# Altium PCB JohnPCB2.PcbDoc
Units mm, origin at the board's own origin, x right, y up, seen from the top; angles counter-clockwise.
Board outline 60 x 75 mm, 2 copper layers (Top Layer, Bottom Layer); 72 components, 52 nets, 225 pads, 24 vias.
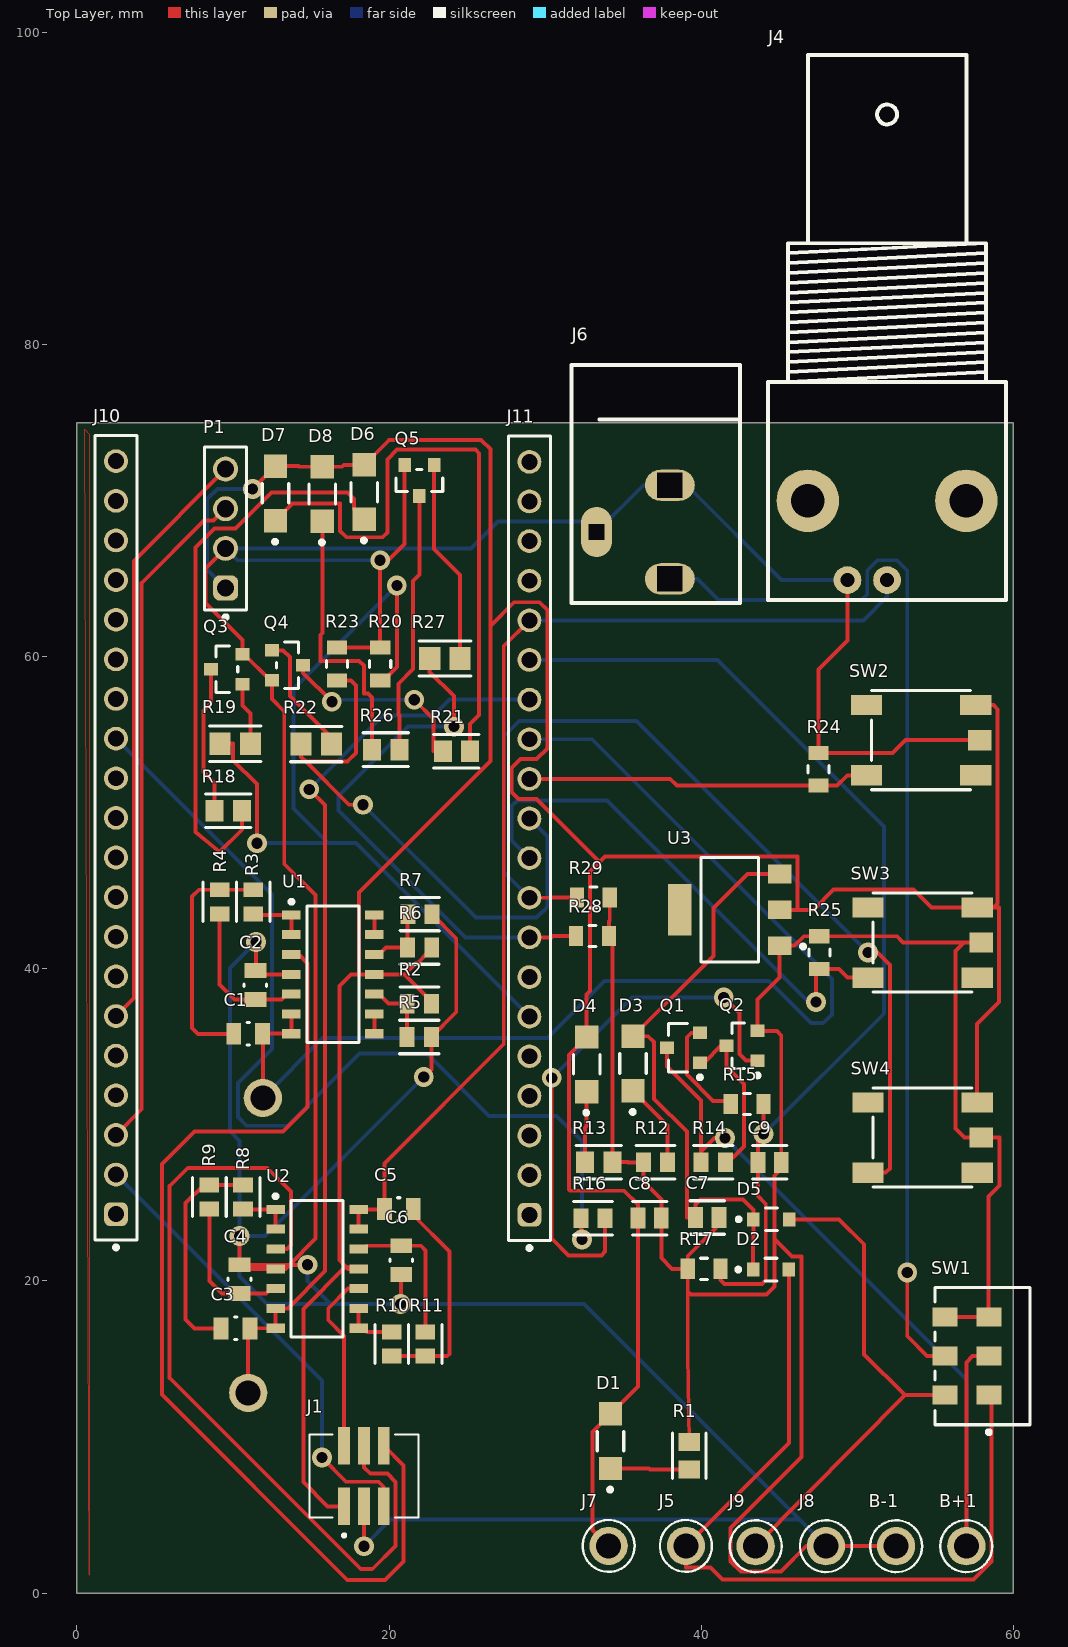
[diagram p0: Top Layer view]
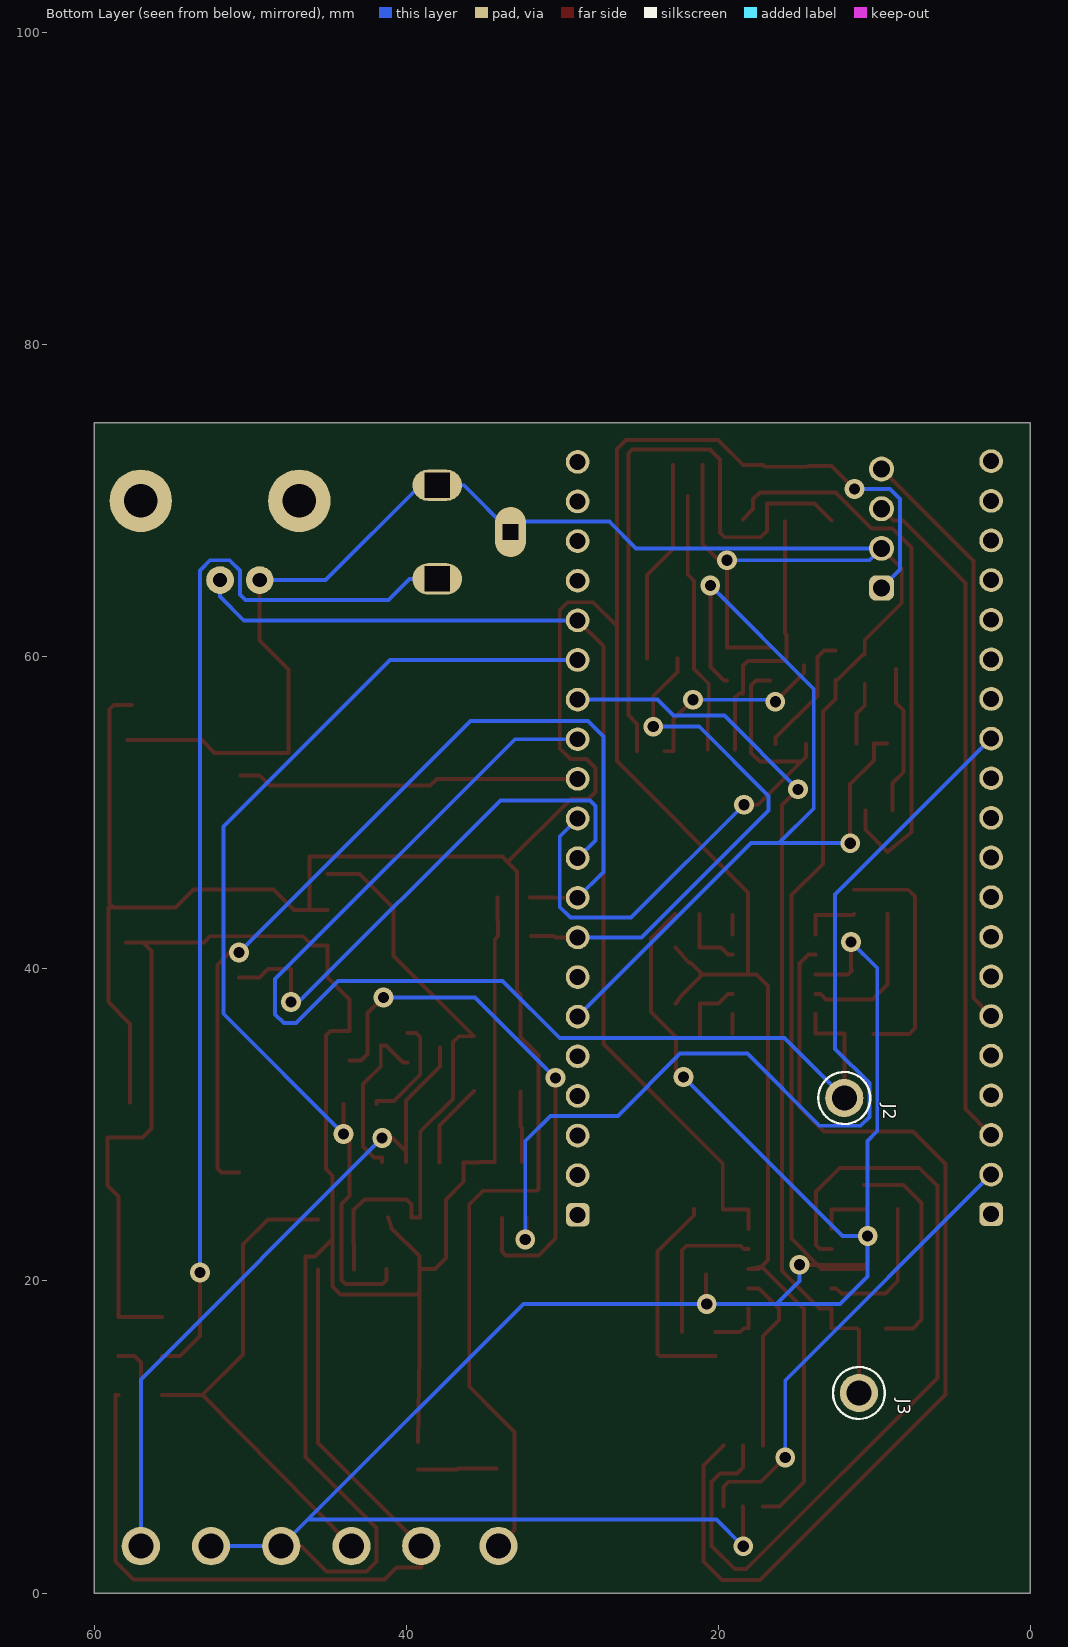
[diagram p1: Bottom Layer view, seen from below]
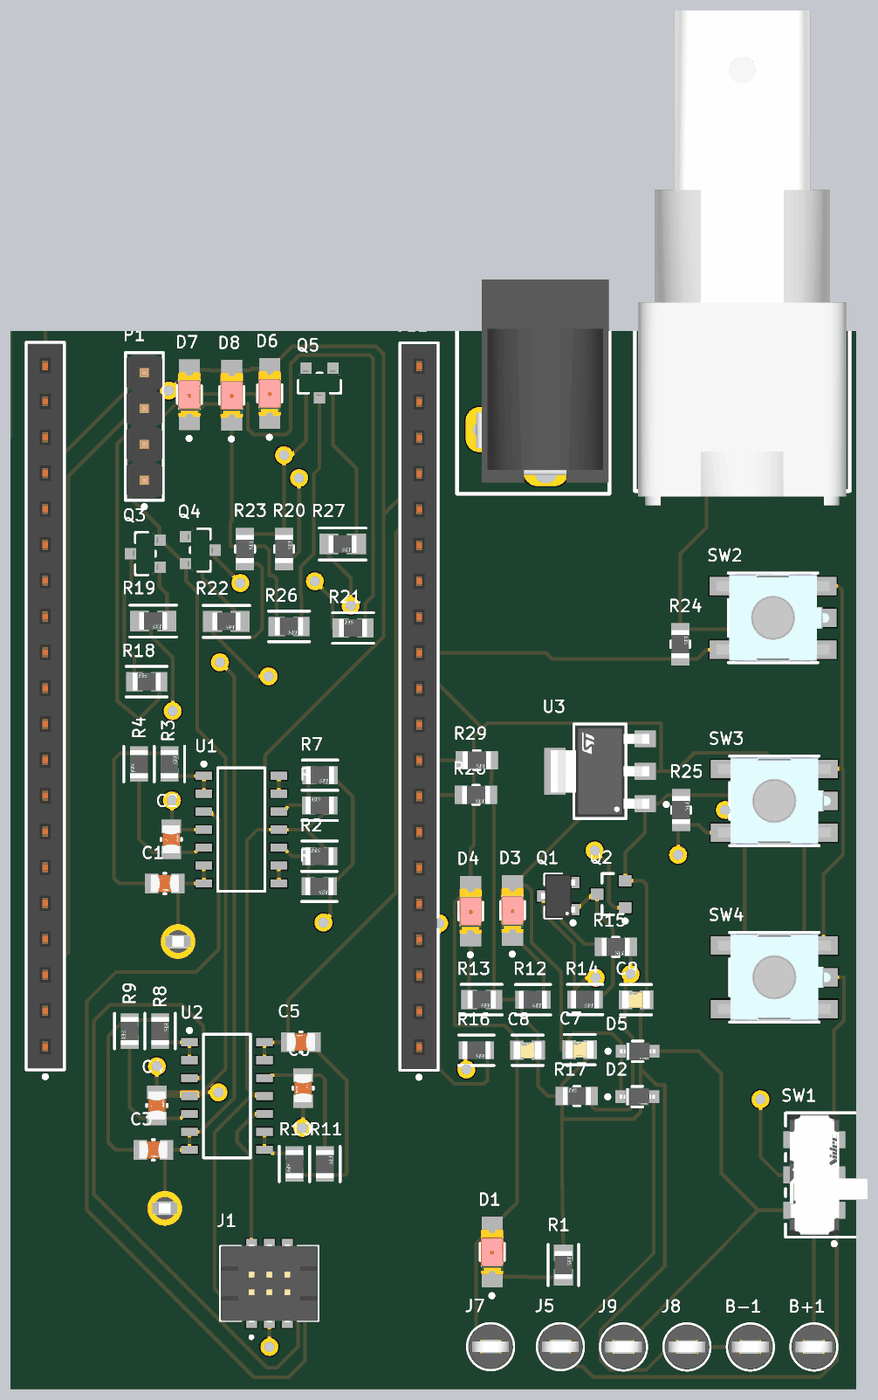
[diagram p2: 3D render of the assembled board from above, using the file's embedded part models]

## Layer stack, top to bottom
Top Solder: solder mask 0.0102, Solder Resist, Dk 3.5
Top Layer: signal copper 0.0356
Dielectric 1: dielectric 0.32, FR-4, Dk 4.8
Bottom Layer: signal copper 0.0356
Bottom Solder: solder mask 0.0102, Solder Resist, Dk 3.5

## Board outline
0,0 60,0 60,75 0,75

## Design rules (kind name [scope] priority, off if disabled: settings)
Clearance [All] p1: gap=0.254 ignorepadtopadclearanceinfootprint=FALSE
PolygonConnect [All] p1: connectstyle=Relief reliefconductorwidth=0.254 reliefentries=4 polygonreliefangle="90 Angle" airgapwidth=0.254
RoutingVias [All] p1: holewidth=0.711 width=1.27 viastyle="Through Hole" minholewidth=0.711 minwidth=1.27 maxholewidth=0.711 maxwidth=1.27
SolderMaskExpansion [All] p1: expansion=0.102 istentingtop=FALSE
SupplyNets "Schematic Supply Nets_1" [InNet('+3V3')] p1: voltage=0.000
SupplyNets "Schematic Supply Nets" [InNet('GND')] p2: voltage=0.000
Width [All] p1: maxlimit=0.254 minlimit=0.254 preferedwidth=0.254
30 further rules are at their usual default settings.

## Classes and differential pairs
component class "Top Level": J10 J11
component class Sheet4: C1 C2 C3 C4 C5 C6 J3 J4 J5 R2 R3 R4 R5 R6 R7 R8 R9 R10 R11 U1 U3
component class Sheet3: D1 J1 R1
component class Sheet2: B+1 B-1 C7 C8 C9 D2 D3 D4 D7 J7 J9 Q1 Q2 R12 R13 R14 R15 R16 R17 SW1 U3
component class r: D7 D9 P1 Q3 Q4 Q5 R18 R19 R20 R21 R22 R23 R24 R25 R26 R27 R28 R29 SW2 SW3 SW4

## Components (designator, comment, footprint, x,y, rotation, side; value= is the part's Value field where it differs from the comment)
B+1 "5006" FP-5006-MFG 57,3 r0 top
B-1 "5006" FP-5006-MFG 52.5,3 r0 top
C1 "33nF" FP-CC0805-0_85-MFG 10.973,35.839 r0 top value="33 nF"
C2 "33nF" FP-CC0805-0_85-MFG 11.43,38.964 r90 top value="33 nF"
C3 "33nF" FP-CC0805-0_85-MFG 10.161,16.962 r0 top value="33 nF"
C4 "33nF" FP-CC0805-0_85-MFG 10.415,20.111 r90 top value="33 nF"
C5 "33nF" FP-CC0805-0_85-MFG 20.626,24.607 r180 top value="33 nF"
C6 "33nF" FP-CC0805-0_85-MFG 20.779,21.331 r270 top value="33 nF"
C7 "0.1UF" FP-C0805C-DN-MFG 40.394,24.066 r0 top value="0.10 μF"
C8 "0.1UF" FP-C0805C-DN-MFG 36.7,24.021 r0 top
C9 "0.01UF" FP-C0805C-DN-MFG 44.388,27.604 r0 top value="10,000 pF"
D1 "LTST-C150KRKT" FP-LTST-C150KRKT-MFG 34.193,9.729 r90 top
D2 "CUS08F30,H3F" FP-USC-MFG 44.481,20.728 r0 top
D3 "LTST-C150KRKT" FP-LTST-C150KRKT-MFG 35.636,33.934 r90 top
D4 "LTST-C150KRKT" FP-LTST-C150KRKT-MFG 32.664,33.884 r90 top
D5 "CUS08F30,H3F" FP-USC-MFG 44.508,23.951 r0 top
D6 "LTST-C150KRKT" FP-LTST-C150KRKT-MFG 18.415,70.561 r90 top
D7 "LTST-C150KRKT" FP-LTST-C150KRKT-MFG 12.724,70.477 r90 top
D8 "LTST-C150KRKT" FP-LTST-C150KRKT-MFG 15.723,70.434 r90 top
J1 "20021221-00006C4LF" AMPHENOL_20021221-00006C4LF 18.39,7.499 r180 top
J2 "5006" FP-5006-MFG 11.913,31.725 r0 bottom
J3 "5006" FP-5006-MFG 10.974,12.822 r0 bottom
J4 "CON BNC JACK R/A 50 OHM PCB" "CON BNC 90deg" 51.92,64.92 r270 top
J5 "5006" FP-5006-MFG 39.028,3.019 r0 top (schematic designator J2)
J6 "PJ-102AH" "CON Barrel PJ-102AH" 33.3,68 r270 top (schematic designator J5)
J7 "5006" FP-5006-MFG 34.075,3.019 r0 top (schematic designator J6)
J8 "5006" FP-5006-MFG 48,3 r0 top (schematic designator J7)
J9 "5006" FP-5006-MFG 43.5,3 r0 top (schematic designator J8)
J10 "61302011821" 61302011821 2.5,48.41 r90 top locked
J11 "61302011821" 61302011821 29,48.37 r90 top locked
P1 "61300411121" 61300411121 9.525,68.224 r90 top
Q1 "SSM3J328R,LF" TOSH-SOT-23F_V 38.871,34.95 r180 top
Q2 "MMBT3904LT1G" ONSC-SOT-23-3-318-08_V 42.621,35.077 r180 top
Q3 "DMN2004K-7" FP-SOT23-MFG 9.601,59.207 r180 top
Q4 "DMN2004K-7" FP-SOT23-MFG 13.487,59.461 r0 top
Q5 "DMN2004K-7" FP-SOT23-MFG 21.946,71.298 r270 top
R1 "300Ω" FP-RMCF0805-IPC_B 39.24,8.806 r90 top
R2 "100k" FP-RMCF0805-IPC_C 21.946,37.77 r180 top
R3 "100k" FP-RMCF0805-IPC_C 11.303,44.298 r90 top
R4 "100k" FP-RMCF0805-IPC_C 9.144,44.298 r270 top
R5 "100k" FP-RMCF0805-IPC_C 21.934,35.636 r0 top
R6 "100k" FP-RMCF0805-IPC_C 21.959,41.377 r180 top
R7 "100k" FP-RMCF0805-IPC_C 21.985,43.51 r0 top
R8 "100k" FP-RMCF0805-IPC_C 10.644,25.383 r90 top
R9 "100k" FP-RMCF0805-IPC_C 8.485,25.381 r270 top
R10 "100k" FP-RMCF0805-IPC_C 20.169,15.957 r270 top
R11 "100k" FP-RMCF0805-IPC_C 22.328,15.957 r90 top
R12 "3k" FP-RMCF0805-IPC_C 37.079,27.604 r0 top
R13 "300Ω" FP-RMCF0805-IPC_B 33.44,27.61 r0 top
R14 "100k" FP-RMCF0805-IPC_C 40.778,27.616 r0 top
R15 "10k" FP-RMCF0805-MFG 42.951,31.344 r0 top
R16 "1k" FP-RMCF0805-IPC_C 33.067,24.021 r0 top
R17 "5.6k" FP-RMCF0805-MFG 40.194,20.778 r180 top
R18 "300Ω" FP-RMCF0805-IPC_B 9.691,50.14 r180 top
R19 "100Ω" FP-RMCF0805-IPC_A 10.149,54.432 r0 top
R20 "10k" FP-RMCF0805-MFG 19.431,59.538 r90 top
R21 "300Ω" FP-RMCF0805-IPC_B 24.32,53.95 r180 top
R22 "100Ω" FP-RMCF0805-IPC_A 15.342,54.407 r0 top
R23 "10k" FP-RMCF0805-MFG 16.662,59.538 r90 top
R24 "10k" FP-RMCF0805-MFG 47.523,52.794 r90 top
R25 "10k" FP-RMCF0805-MFG 47.579,41.042 r90 top
R26 "300Ω" FP-RMCF0805-IPC_B 19.787,54.051 r0 top
R27 "100Ω" FP-RMCF0805-IPC_A 23.582,59.893 r0 top
R28 "10k" FP-RMCF0805-MFG 33.045,42.113 r0 top
R29 "10k" FP-RMCF0805-MFG 33.096,44.577 r0 top
SW1 "CL-SB-22A-11T" FP-CL-SB-22A-11T-MFG 58.04,15.184 r90 top
SW2 "431481031816" 431481031816 54.102,54.661 r180 top
SW3 "431481031816" 431481031816 54.195,41.691 r180 top
SW4 "431481031816" 431481031816 54.195,29.191 r180 top
U1 "LM324DR2G" ONSC-SOIC-14-751A-03_V 16.403,39.655 r0 top
U2 "LM324DR2G" ONSC-SOIC-14-751A-03_V 15.387,20.778 r0 top
U3 "LD1117S33CTR" FP-SOT-223-0046067_14-MFG 41.834,43.79 r180 top (schematic designator U2)

## Footprints (in the part's own frame and the unit in brackets; to place one, negate y for a bottom-side part, rotate by r counter-clockwise, add the part's x,y. Pads: shape width x height; smd on the part's side, far side on the other; paste and mask are expansions set on the pad)
61300411121 [mm] "Pin Header, pitch 2.54 mm, THT, Vertical, single row, 4p"
  rrect50% 1.6x1.6 hole 1.1: 1(-3.81,0)
  round 1.6 hole 1.1: 2(-1.27,0) 3(1.27,0) 4(3.81,0)
  silkscreen extent -5.8,-1.34 5.23,1.34, body extent -5.08,-1.27 5.08,1.27, height 8.57
61302011821 [mm] "Socket Header, Pitch 2.54 mm, THT, Vertical, single row, 20p"
  rrect50% 1.52x1.52 hole 1.02: 1(-24.13,0)
  round 1.52 hole 1.02: 2(-21.59,0) 3(-19.05,0) 4(-16.51,0) 5(-13.97,0) 6(-11.43,0) 7(-8.89,0) 8(-6.35,0) 9(-3.81,0) 10(-1.27,0) 11(1.27,0) 12(3.81,0) 13(6.35,0) 14(8.89,0) 15(11.43,0) 16(13.97,0) 17(16.51,0) 18(19.05,0) 19(21.59,0) 20(24.13,0)
  silkscreen extent -26.38,-1.35 25.78,1.35, body extent -25.65,-1.25 25.65,1.25, height 8.55
431481031816 [mm] "SMD Tact Switch, body 6x6mm"
  rect 2x1.3 smd: A1(-3.5,-2.25) A2(3.5,-2.25) B1(-3.5,2.25) B2(3.5,2.25)
  rect 1.5x1.3 smd: G1(-3.75,0)
  silkscreen extent -3.18,-3.18 3.18,3.18, body extent -4,-3.1 4,3.1, height 3.1
AMPHENOL_20021221-00006C4LF [mm]
  rect 0.76x2.4 smd: 1(1.27,1.95) 2(1.27,-1.95) 3(0,1.95) 4(0,-1.95) 5(-1.27,1.95) 6(-1.27,-1.95)
  silkscreen extent -3.49,-2.65 3.49,3.91, body extent -3.4,-2.75 3.4,2.75, height 5.6
"CON Barrel PJ-102AH" [mm] "5.5mm Barrel Plug (2.1mm ID)"
  oval 2x3.2 hole 1.6 square: 1(3,4.7) 2(-3,4.7)
  oval 3.2x2 hole 1 square: 3(0,0)
  silkscreen extent -10.7,-1.6 4.55,9.2, body extent -10.65,-0.25 3.75,9.15, height 11.01
"CON BNC 90deg" [mil] "BNC INSULATED 90 Degrees"
  round 70 hole 36: 1(0,0) 2(0,-100)
  round 157.48 hole 84: ""(-200,200) ""(-200,-200)
  silkscreen extent -1325,-300 50,300, body extent -1290,-290 90,291, height 605
FP-5006-MFG [mm]
  round 2.45 hole 1.6 paste-2539.97 mask+0: 1(0,0)
  silkscreen extent -1.66,-1.66 1.67,1.66, body extent -1.77,-1.77 1.77,1.77, height 0.25
FP-C0805C-DN-MFG [mm]
  rect 0.95x1.35 smd paste+0 mask+0: 1(-0.75,0) 2(0.75,0)
  silkscreen extent -1.1,-1.08 1.1,1.07, body extent -1.4,-0.85 1.4,0.85, height 0.25
FP-CC0805-0_85-MFG [mm]
  rect 0.95x1.4 smd paste+0 mask+0: 1(-0.925,0) 2(0.925,0)
  silkscreen extent -0.07,-0.73 0.07,0.73, body extent -1.6,-1.05 1.6,1.05, height 0.25
FP-CL-SB-22A-11T-MFG [mm]
  rect 1.2x1.6 smd paste+0 mask+0: 1(-2.5,-0.4) 2(0,-0.4) 3(2.5,-0.4) 4(-2.5,2.4) 5(0,2.4) 6(2.5,2.4)
  silkscreen extent -5,-3.05 4.4,3.05, body extent -4.5,-3.15 4.5,3.3, height 0.25
FP-LTST-C150KRKT-MFG [mm]
  rect 1.5x1.5 smd paste+0 mask+0: 1(-1.75,0) 2(1.75,0)
  silkscreen extent -3.22,-0.85 0.62,0.85, body extent -2.6,-0.95 2.6,0.95, height 0.25
FP-RMCF0805-IPC_A [mm]
  rect 1.355x1.462 smd paste+0 mask+0: 1(-0.976,0) 2(0.976,0)
  silkscreen extent -1.65,-1.13 1.65,1.13, body extent -2.15,-1.23 2.15,1.23, height 0.25
FP-RMCF0805-IPC_B [mm]
  rect 1.155x1.362 smd paste+0 mask+0: 1(-0.876,0) 2(0.876,0)
  silkscreen extent -1.45,-1.08 1.45,1.08, body extent -1.7,-0.93 1.7,0.93, height 0.25
FP-RMCF0805-IPC_C [mm]
  rect 0.955x1.262 smd paste+0 mask+0: 1(-0.776,0) 2(0.776,0)
  silkscreen extent -1.25,-1.07 1.25,1.07, body extent -1.35,-0.77 1.35,0.77, height 0.25
FP-RMCF0805-MFG [mm]
  rect 0.9x1.3 smd paste+0 mask+0: 1(-1.05,0) 2(1.05,0)
  silkscreen extent -0.22,-0.67 0.22,0.67, body extent -1.6,-0.77 1.6,0.77, height 0.25
FP-SOT23-MFG [mm]
  rect 0.9x0.8 smd paste+0 mask+0: 1(-1,0.95) 2(-1,-0.95) 3(1,0)
  silkscreen extent -0.7,-1.5 0.7,1.5, body extent -1.55,-1.6 1.55,1.6, height 0.25
FP-SOT-223-0046067_14-MFG [mm]
  rect 1.5x1.2 smd paste+0 mask+0: 1(-3.2,2.3) 2(-3.2,0) 3(-3.2,-2.3)
  rect 1.5x3.3 smd paste+0 mask+0: 4(3.2,0)
  silkscreen extent -4.83,-3.35 1.85,3.35, body extent -4.05,-3.45 4.05,3.45, height 0.25
FP-USC-MFG [mm]
  rect 0.8x0.9 smd paste+0 mask+0: 1(-1.15,0) 2(1.15,0)
  silkscreen extent -2.22,-0.73 0.38,0.73, body extent -1.65,-0.82 1.65,0.82, height 0.25
ONSC-SOIC-14-751A-03_V [mm] "SOIC, 14-Leads, Body 8.75x4mm, Pitch 1.27mm"
  rect 1.18x0.58 smd: 1(-2.66,3.81) 2(-2.66,2.54) 3(-2.66,1.27) 4(-2.66,0) 5(-2.66,-1.27) 6(-2.66,-2.54) 7(-2.66,-3.81) 8(2.66,-3.81) 9(2.66,-2.54) 10(2.66,-1.27) 11(2.66,0) 12(2.66,1.27) 13(2.66,2.54) 14(2.66,3.81)
  silkscreen extent -2.78,-4.38 1.67,4.77, body extent -2,-4.38 2,4.38, height 1.75
ONSC-SOT-23-3-318-08_V [mm] "SOT23, 3-Leads, Body 2.92x1.3mm, Pitch 0.95mm"
  rect 0.9x0.8 smd: 1(-1,0.95) 2(-1,-0.95) 3(1,0)
  silkscreen extent -1.13,-1.46 0.65,2.02, body extent -0.65,-1.46 0.65,1.46, height 1.11
TOSH-SOT-23F_V [mm] "SOTFL, 3-Leads, Body 3.1x1.9mm, Pitch 0.95mm"
  rect 0.9x0.8 smd: 1(-1.05,0.95) 2(-1.05,-0.95) 3(1.05,0)
  silkscreen extent -1.18,-1.55 0.95,2.02, body extent -1.2,-1.55 1.2,1.55, height 0.88

## Part data
B+1 B-1 J2 J3 J5 J7 J8 J9: library part CMP-19636-000022-1, "PC TEST POINT COMPACT BLACK", Color=Black, Flammability Rating="UL94 V-0", Package Quantity=100, Body Material=Bronze, Contact Material=Bronze, Contact Plating=Tin, Height=0.35inch, Hole Diameter=1.6mm, Housing Color=Black, Inside Diameter=1.78mm, Insulation Material=Nylon, Lead Free="Lead Free", Length=8.89mm, Material=Nylon, Mount=PCB, Number of Ports=1, Orientation=Straight, Outside Diameter=3.18mm, Packaging=Bulk, Plating=Silver, REACH SVHC="No SVHC", RoHS Compliant=Yes, Series=THM
C1 C2 C3 C4 C5 C6: library part CMP-03422-000099-1, "CAP CER 0.033UF 50V X7R 0805, CC0805KRX7R9BB333", Capacitance="33 nF", Manufacturer=Yageo, Manufacturer Part Number=CC0805KRX7R9BB333, Package=CC0805-0.85, Temperature="-30°C to +85°C", Temperature Characteristic=X7R, Temperature Range High=+85°C, Temperature Range Low=-30°C, Tolerance=0.1, Voltage Rating="50 V", Automotive=No, Category=Cap, ComponentLink2Description=Datasheet, ComponentLink2URL=http://www.yageo.com/documents/recent/UPY-GPHC_Y5V_6.3V-to-50V_8.pdf, Device Class L1="Passive Components", Device Class L2=Capacitors, Device Class L3="Ceramic Capacitors", Digikey Description="CAP CER 0.033UF 50V X7R 0805", Footprint Url=http://www.yageo.com/exep/pages/download/literatures/UPY-C_GEN_24.pdf, Height=0.95mm, Ipc Land Pattern Name=CAPC200125X85, Lead Free=Yes, Material=Ceramic, Mouser Description="Multilayer Ceramic Capacitors MLCC - SMD/SMT 33nF 50V X7R 10%", Octopart=https://octopart.com/cc0805krx7r9bb333-yageo-42333931, RoHS=TRUE
C7: library part CMP-03020-000950-1, "CAP CER 0.1UF 50V X7R 0805", Capacitance="0.10 μF", Manufacturer=KEMET, Manufacturer Part Number=C0805C104J5RACTU, Package=C0805C-DN, Temperature="-55°C to +125°C", Temperature Characteristic=X7R, Temperature Coefficient=30ppm/°C, Temperature Range High=+125°C, Temperature Range Low=-55°C, Tolerance=0.05, Voltage Rating="50 V", Automotive=No, Category=Cap, ComponentLink2Description=Datasheet, ComponentLink2URL=https://content.kemet.com/datasheets/KEM_C1003_C0G_SMD.pdf, Device Class L1="Passive Components", Device Class L2=Capacitors, Device Class L3="Ceramic Capacitors", Digikey Description="CAP CER 0.1UF 50V X7R 0805", Height=0.88mm, Ipc Land Pattern Name=CAPC200125X78, Lead Free=Yes, Material=Ceramic, Mouser Description="Multilayer Ceramic Capacitors MLCC - SMD/SMT 50volts 0.1uF X7R 5%", Octopart=https://octopart.com/c0805c104j5ractu-kemet-104634, RoHS=TRUE
C8: library part CMP-03020-034708-1, "CAP CER 10UF 10V X7R 0805", Capacitance=10uF, Case Code (Imperial)=0805, Case Code (Metric)=2012, Max Operating Temperature=125°C, Min Operating Temperature=-55°C, Ratings=AEC-Q200, Tolerance=5%, Voltage Rating=10V, Case/Package=0805, Mount="Surface Mount", Packaging="Tape and Reel", RoHS Compliant=Yes
C9: library part CMP-2007-01173-3, "CAP CER SMD 0805 .01UF X7R 5% 50", Capacitance="10,000 pF", Manufacturer=KEMET, Manufacturer Part Number=C0805C103J5RAC7210, Package=C0805C-DN, Temperature="-55°C to +125°C", Temperature Characteristic=X7R, Temperature Coefficient=30ppm/°C, Temperature Range High=+125°C, Temperature Range Low=-55°C, Tolerance=0.05, Voltage Rating="50 V", Automotive=No, Category=Cap, ComponentLink2Description=Datasheet, ComponentLink2URL=https://content.kemet.com/datasheets/KEM_C1003_C0G_SMD.pdf, Device Class L1="Passive Components", Device Class L2=Capacitors, Device Class L3="Ceramic Capacitors", Digikey Description="CAP CER SMD 0805 .01UF X7R 5% 50", Height=0.88mm, Ipc Land Pattern Name=CAPC200125X78, Lead Free=Yes, Material=Ceramic, Mouser Description="Cap Ceramic 0.01uF 50V X7R 5% Pad SMD 0805 125C T/R", Octopart=https://octopart.com/c0805c103j5rac7210-kemet-3921106, RoHS=TRUE
D1 D3 D4 D6 D7 D8: library part CMP-2000-06617-2, "LED RED CLEAR 1206 SMD", Case Code (Imperial)=1206, Case Code (Metric)=3216, Color=Red, Forward Current=30mA, Forward Voltage=2V, Lens Color=Colorless, Max Operating Temperature=85°C, Min Operating Temperature=-30°C, Package Quantity=1, Power Dissipation=62.5mW, Power Rating=75mW, Reverse Voltage=5V, Test Current=20mA, Case/Package=1206, Depth=1.6mm, Dominant Wavelength=631nm, Height=1.1mm, Illumination Color=Red, Lead Free="Lead Free", Length=3.2mm, Lens Style=Diffused, Lens Transparency=Clear, Luminous Intensity=54mcd, Mount="Surface Mount", Number of Elements=1, Number of LEDs=1, Number of Pins=2, Packaging="Tape and Reel", Radiation Hardening=No, Viewing Angle=130°, Wavelength=639nm, Width=1.6mm
D2 D5: library part CMP-00375-53632863-1, "CUS08F30,H3F Rectifier Diode, Schottky, 1 Phase, 1 Element, 0.8A, 30V V(RRM), Silicon", Average Rectified Current=800mA, Capacitance=170pF, Case/Package=SOD, Max Forward Surge Current (Ifsm)=5A, Max Junction Temperature (Tj)=125°C, Max Repetitive Reverse Voltage (Vrrm)=30V, Min Operating Temperature=-55°C, Peak Reverse Current=50µA, Contact Plating="Silver, Tin", Element Configuration=Single, Forward Current=800mA, Height=1.15mm, Max Operating Temperature=125°C, Max Reverse Voltage (DC)=30V, Mount="Surface Mount", NexarPartId=53632863, Number of Pins=2, Packaging=Digi-Reel®, Peak Non-Repetitive Surge Current=5A, Reverse Voltage=30V, RoHS=Compliant, Schedule B="8541100080, 8541100080"
J1: Package=None, Availability=Unavailable, MF="Amphenol ICC", MP=20021221-00006C4LF, Price=None
J4: library part CMP-0757-00001-1, "75R BNC Straight Jack, Up to 4 GHz, -65 to 165 degC", Manufacturer=Rosenberger, PartNumber=71K101-400A5, ComponentLink1Description="Manufacturer URL", ComponentLink1URL=http://www.rosenberger.de, ComponentLink2Description=Datasheet, ComponentLink2URL=http://rosenberger.de/ok/images/documents/db/71k101-400A5.pdf, ComponentLink3Description="Package Specification", ComponentLink3URL=http://rosenberger.de/ok/images/documents/db/71K101-400A5.pdf, ComponentLink4Description="Series Overview / Design Note", ComponentLink4URL=http://rosenberger.de/ok/images/documents/spez/71.pdf, ComponentLink5Description="Webshop / RFQ", ComponentLink5URL=http://www.rosenberger.com/en/contact/sales/, DatasheetVersion=a00, Design Note="Footprint in library is a generic example - only application specific footprint delivers High Performance", Mounting Technology="Through Hole", PackageDescription="75R BNC, Straight Jack, 12 x 12 x 15 mm", PackageReference=71K101-400A5, PackageVersion=a00
J6: library part "CON PWR PJ-102AH", "Power Barrel Con, 2.0mm ID, 5.5mm OD, 5A", Manufacturer="CUI Devices", Digikey Order=CP-102AH-ND, Manufacturer Code=PJ-102AH, Supplier 1="Arrow Electronics", Supplier Part Number 1=PJ-102AH
J10 J11: library part CMP-1502-01348-3, Contact Resistance=20mΩ, Current Rating=3A, Operating Supply Voltage=250V, Gender=Female, Lead Pitch=2.54mm, NexarPartId=61924744, Number of Pins=20, Orientation=Vertical, RoHS=Non-Compliant
P1: library part CMP-1502-01064-3, Color=Black, Contact Resistance=20mΩ, Current Rating=3A, Max Operating Temperature=105°C, Min Operating Temperature=-40°C, Operating Supply Voltage=250V, Connector Type="Male Pin", Contact Material=Copper, Contact Mating Length=5.9944mm, Contact Plating=Gold, Gender=Male, Height=8.89mm, Lead Free="Lead Free", Lead Pitch=2.54mm, Mount="Through Hole", NexarPartId=32855522, Number Of Contacts=4, Number of Pins=4, Number of Positions=4, Number of Rows=1, Orientation=Vertical, Packaging=Bulk, Pitch=2.54mm, REACH SVHC=Unknown, RoHS=Compliant, Termination=Solder, Voltage Rating=250V
Q1: library part CMP-2100-03686-1, "TOSHIBA Field-Effect Transistor Silicon P-Channel MOS Type (U-MOS VI), 20 V, -55 to 125 degC, 3-Pin SOTFL, RoHS, Tape and Reel", Case/Package=SOT-23-3, Continuous Drain Current (ID)=6A, Drain To Source Breakdown Voltage=-20V, Drain To Source Resistance=47.4mOhm, Drain to Source Voltage (Vdss)=20V, Gate to Source Voltage (Vgs)=8V, Input Capacitance=840pF, Manufacturer=Toshiba, Max Operating Temperature=150degC, Max Power Dissipation=1W, Min Operating Temperature=-55degC, Package Description="3-Pin Small Outline Transistor, Flat Lead, Body 2.9 x 1.8 mm, Pitch 0.95 mm", Package Quantity=3000, Package Reference=SOT-23F, Power Dissipation=2W, Datasheet URL=https://toshiba.semicon-storage.com/info/docget.jsp?did=2429&prodName=SSM3J328R, Datasheet Version=41699.0, Element Configuration=Single, Manufacturer URL=http://www.toshiba.com/, Mount=SurfaceMount, Number Of Channels=1, Number of Elements=1, Number of Pins=3, Package URL=https://toshiba.semicon-storage.com/ap-en/design-support/package/detail.SOT-23F.html, Packaging=TapeandReel, Radiation Hardening=No, Rds On Max=29.8mOhm, RoHSCompliant=true, Turn-Off Delay Time=107ns, Turn-On Delay Time=32ns
Q2: library part CMP-1048-00631-1, "General Purpose Transistor, NPN Silicon, 3-Pin SOT-23, Pb-Free, Tape and Reel", Manufacturer="On Semiconductor", ComponentLink1Description="Manufacturer URL", ComponentLink1URL=http://www.onsemi.com/, ComponentLink2Description=Datasheet, ComponentLink2URL=http://www.onsemi.cn/pub_link/Collateral/MMBT3904LT1-D.PDF, ComponentLink3Description="Package Specification", ComponentLink3URL=http://www.onsemi.cn/pub_link/Collateral/318-08.PDF, DatasheetVersion="Rev. 12", fT Min (MHz)=300, IC Continuous (A)=0.2, Mounting Technology="Surface Mount", PackageDescription="3-Pin Small Outline Transistor, Body 2.92 x 1.3 mm, Pitch 0.95 mm", PackageReference=SOT-23-3-318-08, PackageVersion="Rev. AP, 11/2009", Packing="Tape and Reel", PartNumber=MMBT3904LT1G, Polarity=NPN, RoHS=TRUE
Q3 Q4 Q5: library part CMP-12801-000057-1, "MOSFET N-CH 20V 0.63A SOT23-3", Continuous Drain Current=630mA, Drain To Source Breakdown Voltage=20V, Drain To Source Resistance=0.4Ω, Gate To Source Voltage=8V, Input Capacitace At Vds="150pF @ 16V", Manufacturer="Diodes Inc.", Max Forward Diode Voltage=1V, Max Junction Temp=+150°C, Package=SOT23, Power Dissipation=350mW, Pulse Drain Current=1.5A, Temperature="-65°C to +150°C", Temperature Range Low=-65°C, Automotive=Yes, Automotive Grade="Grade 0", Category=Trans, ComponentLink2Description=Datasheet, ComponentLink2URL=https://www.diodes.com/assets/Datasheets/ds30938.pdf, Depletion Mode=False, Device Class L1="Discrete Semiconductors", Device Class L2=Transistors, Device Class L3=MOSFETs, Digikey Description="MOSFET N-CH 20V 0.63A SOT23-3", Drain To Source Voltage=20V, Footprint Url=https://www.diodes.com/assets/Package-Files/SOT23.pdf, Gate Charge At Vgs="0.9nC @ 4.5V", Height=1.1mm, Lead Free=Yes, Manufacturer Part Number=DMN2004K-7, Mouser Description="MOSFET 20V 540mA", Number Of Channels=1, Number Of N Channels=1, Octopart=https://octopart.com/dmn2004k-7-diodes+inc.-7127688, Reverse Recovery Charge=0.85nC, Reverse Recovery Time=5.5ns, RoHS=TRUE, Rthja Max=357°C/W, Standoff Height=0.013mm, Temperature Range High=+150°C, Threshold Vgs Max=1V, Threshold Vgs Min=0.5V, Turn Off Delay Time=59.4ns, Turn On Delay Time=5.7ns
R1 R18 R21 R26: library part CMP-26527-003681-1, "300Ω ±5% 0.125W 0805 Thick Film Chip Resistor AEC-Q200 compliant, RMCF0805JT300R", Case Code (Imperial)=0805, Case Code (Metric)=2012, Max Operating Temperature=155°C, Max Power Dissipation=125mW, Min Operating Temperature=-55°C, Package Quantity=5000, Resistance=300R, Resistor Type="Thick Film", Temperature Coefficient=200ppm/°C, Tolerance=5%, Case/Package=0805, Contact Plating=Tin, Features="Automotive AEC-Q200", Height=0.026inch, Length=0.079inch, Mount="Surface Mount", Number of Terminations=2, Packaging="Tape and Reel", Radiation Hardening=No, RoHS Compliant=Yes, Series=RMCF, Width=0.049inch
R2 R3 R4 R5 R6 R7 R8 R9 R10 R11: library part CMP-26527-003818-1, "100kΩ ±1% 0.125W 0805 Thick Film Chip Resistor AEC-Q200 compliant, RMCF0805FG100K", Case Code (Imperial)=0805, Case Code (Metric)=2012, Max Operating Temperature=155°C, Max Power Dissipation=125mW, Min Operating Temperature=-55°C, Package Quantity=10000, Resistance=100kR, Resistor Type="Thick Film", Temperature Coefficient=100ppm/°C, Tolerance=1%, Case/Package=0805, Construction=Rectangular, Contact Plating=Tin, Depth=1.25mm, Features="Automotive AEC-Q200", Height=0.026inch, Length=0.079inch, Military Standard=Not, Mount="Surface Mount", Number of Terminations=2, Packaging="Tape and Reel", Radiation Hardening=No, RoHS Compliant=Yes, Series=RMCF, Width=0.049inch
R12: library part CMP-26527-006913-1, "3kΩ ±5% 0.125W 0805 Thick Film Chip Resistor AEC-Q200 compliant", Case Code (Imperial)=0805, Case Code (Metric)=2012, Max Operating Temperature=155°C, Max Power Dissipation=125mW, Min Operating Temperature=-55°C, Resistance=3kR, Resistor Type="Thick Film", Temperature Coefficient=200ppm/°C, Tolerance=5%, Case/Package=0805, Construction=Rectangular, Contact Plating=Tin, Depth=1.25mm, Features="Automotive AEC-Q200", Height=0.026inch, Length=0.079inch, Military Standard=Not, Mount="Surface Mount", Number of Terminations=2, Packaging="Tape and Reel", Radiation Hardening=No, RoHS Compliant=Yes, Series=RMCF, Width=0.049inch
R13: library part CMP-26527-003681-1, "300Ω ±5% 0.125W 0805 Thick Film Chip Resistor AEC-Q200 compliant", Case Code (Imperial)=0805, Case Code (Metric)=2012, Max Operating Temperature=155°C, Max Power Dissipation=125mW, Min Operating Temperature=-55°C, Package Quantity=5000, Resistance=300R, Resistor Type="Thick Film", Temperature Coefficient=200ppm/°C, Tolerance=5%, Case/Package=0805, Contact Plating=Tin, Features="Automotive AEC-Q200", Height=0.026inch, Length=0.079inch, Mount="Surface Mount", Number of Terminations=2, Packaging="Tape and Reel", Radiation Hardening=No, RoHS Compliant=Yes, Series=RMCF, Width=0.049inch
R14: library part CMP-26527-003818-1, "100kΩ ±1% 0.125W 0805 Thick Film Chip Resistor AEC-Q200 compliant", Case Code (Imperial)=0805, Case Code (Metric)=2012, Max Operating Temperature=155°C, Max Power Dissipation=125mW, Min Operating Temperature=-55°C, Package Quantity=10000, Resistance=100kR, Resistor Type="Thick Film", Temperature Coefficient=100ppm/°C, Tolerance=1%, Case/Package=0805, Construction=Rectangular, Contact Plating=Tin, Depth=1.25mm, Features="Automotive AEC-Q200", Height=0.026inch, Length=0.079inch, Military Standard=Not, Mount="Surface Mount", Number of Terminations=2, Packaging="Tape and Reel", Radiation Hardening=No, RoHS Compliant=Yes, Series=RMCF, Width=0.049inch
R15: library part CMP-26527-000121-1, "RES 10K OHM 1% 1/8W 0805", Case Code (Imperial)=0805, Case Code (Metric)=2012, Max Operating Temperature=155°C, Max Power Dissipation=125mW, Min Operating Temperature=-55°C, Resistance=10kR, Resistor Type="Thick Film", Temperature Coefficient=100ppm/°C, Tolerance=1%, Case/Package=0805, Construction=Rectangular, Contact Plating=Tin, Depth=1.25mm, Features="Automotive AEC-Q200", Height=0.026inch, Lead Free="Lead Free", Length=2mm, Military Standard=Not, Mount="Surface Mount", Number of Terminations=2, Packaging="Tape and Reel", Power Rating=125mW, Radiation Hardening=No, RoHS Compliant=Yes, Series=RMCF, Size Code=0805, Width=0.049inch
R16: library part CMP-26527-002331-1, "1kΩ ±1% 0.125W 0805 Thick Film Chip Resistor AEC-Q200 compliant", Case Code (Imperial)=0805, Case Code (Metric)=2012, Max Operating Temperature=155°C, Max Power Dissipation=125mW, Min Operating Temperature=-55°C, Resistance=1kR, Resistor Type="Thick Film", Temperature Coefficient=100ppm/°C, Tolerance=1%, Case/Package=0805, Construction=Rectangular, Contact Plating=Tin, Depth=1.25mm, Features="Automotive AEC-Q200", Height=0.026inch, Lead Free="Lead Free", Length=2mm, Military Standard=Not, Mount="Surface Mount", Number of Terminations=2, Packaging="Tape and Reel", Power Rating=125mW, Radiation Hardening=No, RoHS Compliant=Yes, Series=RMCF, Size Code=0805, Width=0.049inch
R17: library part CMP-2001-00434-1, Manufacturer=Panasonic, Part Number=ERJ-6GEYJ563V
R19 R22 R27: library part CMP-26527-001731-1, "100Ω ±1% 0.125W 0805 Thick Film Chip Resistor AEC-Q200 compliant, RMCF0805FT100R", Case Code (Imperial)=0805, Case Code (Metric)=2012, Max Operating Temperature=155°C, Max Power Dissipation=125mW, Min Operating Temperature=-55°C, Power Rating=250mW, Resistance=100R, Resistor Type="Thick Film", Temperature Coefficient=100ppm/°C, Tolerance=1%, Case/Package=0805, Construction=Rectangular, Contact Plating=Tin, Depth=1.25mm, Features="Automotive AEC-Q200", Height=0.026inch, Lead Free="Lead Free", Length=2mm, Military Standard=Not, Mount="Surface Mount", Number of Terminations=2, Packaging="Tape and Reel", Radiation Hardening=No, RoHS Compliant=Yes, Series=RMCF, Size Code=0805, Width=0.049inch
R20 R23 R24 R25 R28 R29: library part CMP-26527-000121-1, "RES 10K OHM 1% 1/8W 0805, RMCF0805FT10K0", Case Code (Imperial)=0805, Case Code (Metric)=2012, Max Operating Temperature=155°C, Max Power Dissipation=125mW, Min Operating Temperature=-55°C, Resistance=10kR, Resistor Type="Thick Film", Temperature Coefficient=100ppm/°C, Tolerance=1%, Case/Package=0805, Construction=Rectangular, Contact Plating=Tin, Depth=1.25mm, Features="Automotive AEC-Q200", Height=0.026inch, Lead Free="Lead Free", Length=2mm, Military Standard=Not, Mount="Surface Mount", Number of Terminations=2, Packaging="Tape and Reel", Power Rating=125mW, Radiation Hardening=No, RoHS Compliant=Yes, Series=RMCF, Size Code=0805, Width=0.049inch
SW1: library part CMP-71745-000011-1, "SWITCH SLIDE DPDT 200MA 12V", Current Rating=200mA, Max Operating Temperature=85°C, Min Operating Temperature=-40°C, Operating Force=153gf, Voltage Rating (DC)=12V, Actuator Length=2mm, Actuator Material=Nylon, Actuator Type=Standard, Contact Material=Copper, Contact Plating=Silver, Contact Style=Non-Shorting, Electrical Life=10000Cycles, Mount="Surface Mount", Packaging="Cut Tape", Series=CL-SB, Switch Function=On-On, Switch Travel=2mm, Throw Configuration=DPDT
SW2 SW3 SW4: library part CMP-1457-00011-3, "Tactile Switch, 0.05A, 12Vdc, 160Gf, Smd Rohs Compliant: Yes", Current Rating=50mA, Insulation Resistance=100MΩ, Max Operating Temperature=85°C, Min Operating Temperature=-40°C, Voltage Rating=12V, Actuator Material="Liquid Crystal Polymer, Polymer", Contact Plating=Silver, Height=3.1mm, Illumination Type=Non-Illuminated, Mechanical Life=1Mcycles, Mount="Surface Mount", Packaging="Tape and Reel", RoHS=Compliant, Switch Function=Off-Mom, Switch Travel=250µm, Termination=SMD/SMT, Throw Configuration=SPST
U1 U2: library part CMP-1310-00171-1, "Single Supply Quad Operational Amplifier, 3 to 32 V, 0 to 70 degC, 14-Pin SOIC, Pb-Free, Tape and Reel", Manufacturer="On Semiconductor", ComponentLink1Description="Manufacturer URL", ComponentLink1URL=http://www.onsemi.com/, ComponentLink2Description=Datasheet, ComponentLink2URL=http://www.onsemi.cn/pub_link/Collateral/LM324-D.PDF, ComponentLink3Description="Package Specification", ComponentLink3URL=http://www.onsemi.com/pub_link/Collateral/751A-03.PDF, DatasheetVersion="Rev. 25", Mounting Technology="Surface Mount", PackageDescription="14-Pin Small Outline Integrated Circuit, Body 8.65 x 3.9 mm, Pitch 1.27 mm", PackageReference=SOIC-14-751A-03, PackageVersion="Rev. K, 05/2011", Packing="Tape and Reel", PartNumber=LM324DR2G, RoHS=TRUE, VCC Max (V)=32, VCC Min (V)=3
U3: library part CMP-0244-00307-2, "IC REG LINEAR 3.3V 800MA SOT223", Case/Package=SOT-223, Dropout Voltage=1.1V, Input Bias Current=5mA, Max Input Voltage=15V, Max Operating Temperature=125°C, Max Output Current=1.3A, Max Output Voltage=3.3V, Max Power Dissipation=12W, Min Input Voltage=5.3V, Min Operating Temperature=-40°C, Output Current=950mA, Output Voltage Accuracy=1%, Package Quantity=1, Quiescent Current=10mA, Accuracy=1%, Contact Plating=Tin, Height=1.8mm, Lead Free="Lead Free", Length=6.5mm, Max Supply Voltage=15V, Min Output Voltage=3.3V, Min Supply Voltage=3.3V, Mount="Surface Mount", Nominal Output Voltage=3.3V, Number of Outputs=1, Number of Pins=4, Number of Regulators=1, Number of Terminals=4, Output Type=Fixed, Output Voltage=3.3V, Packaging="Tape and Reel", Polarity=Positive, Power Dissipation=12W, Radiation Hardening=No, REACH SVHC="No SVHC", Termination=SMD/SMT, Weight=0.01lb, Width=3.5mm

## Via types
v1: diameter 1.27, hole 0.711, Top Layer to Bottom Layer, 24 vias

## Nets (pads, with @x,y where several pads share a name; then routed paths per layer and width w, separated by ;. In a path a pad name is that pad's centre, name@x,y a point inside that pad or via, vN(x,y) a via of type N, cw(c..) or ccw(c..) an arc to the next point about the centre after c; other vN are vias at no path point)
+3V3: C8.1 D1.2 D4.2 D6.2 D7.2 D8.2 J1.1 J7.1 P1.1 R2.1 R6.1 SW2.A1 SW3.A1 SW4.A1 U1.11 U2.11 U3.2 | length 245.1
  Top Layer w0.254: v1(11.261,70.764) D7.2 14.199,72.227 14.242,72.184 D8.2 16.993,72.184 17.12,72.311 D6.2 20.012,73.908 25.908,73.908 26.492,73.324 26.492,61.976 ; J1.1 16.067,5.549 14.503,7.112 14.503,18.212 17.221,20.93 ; R2.1 22.371,38.274 21.132,39.513 21.122,39.662 21.116,39.758 ; R6.1 22.385,40.978 22.042,40.588 21.819,40.365 21.723,40.365 21.116,39.758 ; J7.1 33.045,4.049 33.045,10.332 D1.2 35.95,13.237 C8.1 35.95,24.892 35.061,25.781 31.598,25.781 31.521,25.857 31.521,34.491 D4.2 32.664,38.354 32.893,38.583 32.893,46.253 33.49,46.85 ; U3.2 46.177,43.79 ; SW2.A1 58.735,56.911 59.004,56.642 59.004,44.196 58.749,43.941 ; SW4.A1 57.683,31.441 57.683,36.474 59.08,37.871 59.08,43.941 58.749,43.941 ; 17.221,20.93 17.373,20.778 U2.11 17.221,20.93 ; 17.221,20.93 16.815,21.336 16.815,38.919 17.551,39.655 18.085,39.655 ; 18.085,39.655 21.014,39.655 21.116,39.758 ; 18.085,39.655 18.085,44.907 26.492,53.315 26.492,61.976 ; 26.492,61.976 28.016,63.5 29.642,63.5 30.15,62.992 30.15,54.127 29.464,53.442 28.423,53.442 27.859,52.878 27.859,51.338 28.296,50.902 29.439,50.902 33.49,46.85 ; 33.49,46.85 33.833,47.193 46.177,47.193 46.177,43.79 ; 46.177,43.79 47.193,43.79 48.489,45.085 53.618,45.085 54.762,43.941 SW3.A1 58.749,43.941
  Bottom Layer w0.254: P1.1 8.331,65.608 8.331,70.104 8.992,70.764 v1(11.261,70.764)
GND: B-1.1 C2.2 C4.2 C6.2 C7.2 C8.2 C9.2 J1.3 J4.2 J6.2 J6.3 J8.1 P1.2 Q2.2 Q3.2 Q4.2 Q5.2 R1.2 R5.2 R7.2 R12.1 R13.2 R17.2 R20.2 R23.2 R24.2 R25.2 R28.2 R29.2 SW1.3 SW1.6 SW2.G1 SW3.G1 SW4.G1 U1.4 U2.4 U3.1 | length 444.3
  Top Layer w0.254: P1.2 8.23,65.659 8.23,63.459 10.601,61.087 Q3.2 10.719,60.157 12.365,58.511 Q4.2 12.487,57.286 13.284,56.49 13.284,46.736 15.291,44.729 15.291,22.708 13.62,21.036 ; v1(10.414,22.885) 10.414,21.036 C4.2 ; v1(11.481,41.732) 11.481,39.889 C2.2 11.663,39.655 U1.4 ; v1(14.783,21.036) 13.62,21.036 ; R23.2 R20.2 v1@19.431,65.659 ; v1(18.39,2.997) J1.3 ; v1(19.431,66.192) v1@19.431,65.659 ; v1(20.726,18.517) 20.779,18.569 C6.2 ; Q5.2 20.996,67.224 v1@19.431,65.659 ; v1(22.225,33.071) 22.71,33.556 R5.2 24.308,37.234 24.308,41.963 R7.2 ; R29.2 34.146,43.089 34.095,43.038 R28.2 34.315,41.893 R13.2 35.306,27.61 35.312,27.604 R12.1 36.303,26.369 37.45,25.222 C8.2 37.45,21.463 38.136,20.777 R17.2 ; R1.2 39.144,15.259 39.144,19.327 ; C7.2 40.922,23.368 39.144,21.59 R17.2 ; J4.2 49.38,61.039 47.523,59.181 R24.2 52.273,53.844 53.09,54.661 SW2.G1 ; B-1.1 J8.1 46.739,3 45.11,1.372 42.545,1.372 41.885,2.032 41.885,4.166 46.431,8.712 46.431,21.565 45.822,21.565 44.704,22.682 ; SW1.6 SW1.3@58.42,17.684 ; SW3.G1 56.855,41.691 ; SW1.3 SW1.3@58.42,17.684 ; C4.2 13.62,21.036 ; C4.2 10.674,20.778 U2.4 13.361,20.778 13.62,21.036 ; 39.144,19.327 R17.2 ; 39.144,19.327 39.345,19.126 44.196,19.126 44.704,19.634 44.704,22.682 ; 44.704,22.682 44.704,26.744 45.138,27.178 C9.2 45.138,35.745 44.856,36.027 Q2.2 43.621,38.049 45.034,39.462 U3.1 45.999,41.49 46.602,42.092 R25.2 52.553,42.092 52.954,41.691 56.855,41.691 ; 56.855,41.691 56.312,41.148 56.312,29.775 56.896,29.191 SW4.G1 59.131,29.191 59.131,26.111 58.42,25.4 SW1.3@58.42,17.684
  Bottom Layer w0.254: v1(11.481,41.732) 9.799,40.05 9.799,29.597 10.414,28.981 v1(10.414,22.885) ; v1(14.783,21.036) 14.783,19.99 16.256,18.517 ; v1(18.39,2.997) 20.091,4.699 46.301,4.699 ; v1(19.431,66.192) 10.287,66.192 P1.2 25.248,66.954 26.975,68.682 33.3,68.682 J6.3 36.3,71 J6.2 39.081,71 45.161,64.92 J4.2 ; v1(22.225,33.071) 12.04,22.885 v1(10.414,22.885) ; B-1.1 J8.1 46.301,4.699 ; v1(10.414,22.885) 10.414,20.295 12.192,18.517 16.256,18.517 ; 16.256,18.517 v1(20.726,18.517) 32.483,18.517 46.301,4.699
NetB+1_1: B+1.1 Q1.3 R14.1 SW1.2 | length 56.1
  Top Layer w0.254: Q1.3 37.821,33.753 40.002,31.572 40.002,28.292 ; R14.1 40.002,28.292 ; v1(41.529,29.159) 40.869,29.159 40.002,28.292 ; B+1.1 57,14.78 57.404,15.184 SW1.2
  Bottom Layer w0.254: v1(41.529,29.159) 57,13.688 B+1.1
NetC1_1: C1.1 R3.2 R4.1 | length 15.4
  Top Layer w0.254: C1.1 7.747,35.839 7.366,36.22 7.366,44.628 7.812,45.073 R4.1 R3.2
NetC1_2: C1.2 J2.1 J11.13 U1.6 U1.7 | length 76.2
  Top Layer w0.254: J2.1 11.913,35.825 C1.2 11.904,35.845 U1.7 U1.6
  Bottom Layer w0.254: J2.1 15.748,35.56 30.15,35.56 33.807,39.218 44.348,39.218 47.041,36.525 47.828,36.525 48.387,37.084 48.387,39.345 33.012,54.72 J11.13
NetC2_1: C2.1 R4.2 U1.5 | length 9.7
  Top Layer w0.254: R4.2 9.144,38.989 10.094,38.039 C2.1 13.096,38.039 13.443,38.385 U1.5
NetC3_1: C3.1 R8.2 R9.1 | length 15.2
  Top Layer w0.254: R9.1 9.55,26.157 9.553,26.159 ; C3.1 7.52,16.962 6.963,17.518 6.963,24.994 8.128,26.159 9.553,26.159 ; R8.2 9.553,26.159
NetC3_2: C3.2 J3.1 J11.14 U2.6 U2.7 | length 59.1
  Top Layer w0.254: J3.1 10.974,16.849 C3.2 11.092,16.968 U2.7 U2.6 13.513,18.238 15.9,20.625 15.9,50.495 v1(14.884,51.511)
  Bottom Layer w0.254: v1(14.884,51.511) 19.601,56.227 22.851,56.227 23.883,57.26 J11.14
NetC4_1: C4.1 R9.2 U2.5 | length 9.3
  Top Layer w0.254: R9.2 8.485,19.984 9.283,19.186 C4.1 12.105,19.186 12.427,19.508 U2.5
NetC5_1: C5.1 R10.2 R11.1 | length 14
  Top Layer w0.254: R10.2 R11.1 23.726,15.182 23.875,15.33 23.875,21.888 21.551,24.212 C5.1
NetC5_2: C5.2 J4.1 J11.16 U2.13 U2.14 | length 69.1
  Top Layer w0.254: U2.13 U2.14 19.682,24.588 C5.2 19.701,27.524 27.351,35.174 27.351,60.691 J11.16
  Bottom Layer w0.254: J11.16 50.403,62.34 51.92,63.857 J4.1
NetC6_1: C6.1 R11.2 U2.12 | length 9.7
  Top Layer w0.254: U2.12 18.347,22.048 18.554,22.256 C6.1 22.038,22.256 22.328,21.966 R11.2
NetC7_1: C7.1 D2.1 D3.2 D5.1 U3.3 | length 38.5
  Top Layer w0.254: D2.1 43.331,22.301 43.358,22.329 D5.1 43.358,24.536 42.672,25.222 39.974,25.222 39.644,24.892 C7.1 39.644,24.054 39.091,24.054 39.091,29.566 36.982,31.674 36.982,35.306 36.604,35.684 D3.2 40.792,40.841 40.792,43.905 42.977,46.09 U3.3
NetC9_1: C9.1 J11.15 R15.2 R17.1 | length 65.7
  Top Layer w0.254: R17.1 41.244,20.066 41.498,19.812 43.891,19.812 44.145,20.066 44.145,24.943 43.638,25.45 C9.1 43.638,29.286 v1@44.001,29.649 ; v1(44.001,29.413) v1@44.001,29.649 ; R15.2 v1@44.001,29.649
  Bottom Layer w0.254: J11.15 41.038,59.8 51.714,49.124 51.714,37.126 v1(44.001,29.413)
NetD1_1: D1.1 R1.1 | length 5.1
  Top Layer w0.254: D1.1 36.678,7.979 36.727,7.93 R1.1
NetD2_2: D2.2 J5.1 SW1.1 | length 53.1
  Top Layer w0.254: D2.2 45.631,9.622 J5.1 39.028,1.626 40.615,1.626 41.377,0.864 57.455,0.864 58.623,2.032 58.623,12.684 SW1.1
NetD3_1: D3.1 R12.2 | length 5.5
  Top Layer w0.254: D3.1 37.855,29.966 R12.2
NetD4_1: D4.1 R13.1 | length 4.6
  Top Layer w0.254: R13.1 32.564,29.82 32.664,29.92 D4.1
NetD5_2: D5.2 J9.1 SW1.4 | length 32.4
  Top Layer w0.254: J9.1 53.061,12.684 ; D5.2 48.846,23.951 50.444,22.352 50.444,15.3 53.061,12.684 ; SW1.4 53.061,12.684
NetD6_1: D6.1 R18.1 | length 36.8
  Top Layer w0.254: R18.1 10.566,48.92 9.144,47.498 7.595,48.768 7.595,67.005 8.814,68.224 10.16,68.224 12.471,70.536 17.323,70.536 17.755,70.104 17.755,69.472 D6.1
NetD7_1: D7.1 R21.1 | length 39.9
  Top Layer w0.254: D7.1 13.822,69.825 16.866,69.825 16.866,68.072 17.272,67.666 19.583,67.666 19.888,67.97 19.888,72.644 20.523,73.279 25.527,73.279 25.756,73.05 25.756,56.261 25.196,55.701 R21.1
NetD8_1: D8.1 R26.1 | length 17.6
  Top Layer w0.254: D8.1 15.723,61.519 15.621,61.417 15.621,59.741 18.085,59.741 18.39,59.436 18.39,57.658 18.644,57.658 18.911,57.391 R26.1
NetJ1_2: J1.2 U2.10 | length 11.7
  Top Layer w0.254: J1.2 17.12,16.485 16.104,17.501 16.104,18.237 17.374,19.508 U2.10
NetJ1_4: J1.4 U2.3 | length 53.8
  Top Layer w0.254: U2.3 13.462,22.048 13.716,22.302 13.716,25.73 12.192,27.254 7.112,27.254 5.944,26.086 5.944,13.792 18.212,1.524 18.923,1.524 20.422,3.023 20.422,7.112 19.888,7.645 18.796,7.645 18.39,8.052 J1.4
NetJ1_5: J1.5 J10.2 | length 29.6
  Top Layer w0.254: v1(15.697,8.687) 17.254,7.13 19.337,7.13 19.66,6.807 J1.5
  Bottom Layer w0.254: J10.2 15.697,13.623 v1(15.697,8.687)
NetJ1_6: J1.6 U1.3 | length 65
  Top Layer w0.254: U1.3 14.218,40.925 14.783,40.361 14.783,31.14 13.208,29.566 7.518,29.566 5.436,27.483 5.436,12.725 17.323,0.838 19.736,0.838 20.93,2.032 20.93,8.179 J1.6
NetJ6_1: J6.1 SW1.5 | length 70
  Top Layer w0.254: v1(53.213,20.549) 53.213,16.459 54.488,15.184 SW1.5
  Bottom Layer w0.254: J6.1 39.776,65 41.126,63.65 50.292,63.65 50.65,64.008 50.65,65.534 51.308,66.192 52.553,66.192 53.213,65.532 v1(53.213,20.549)
NetJ10_3: J10.3 P1.3 | length 43.4
  Top Layer w0.254: J10.3 4.149,31.009 4.149,64.73 8.152,68.732 8.763,68.732 P1.3
NetJ10_6: J10.6 P1.4 | length 38
  Top Layer w0.254: J10.6 3.641,38.121 3.641,66.15 P1.4
NetJ10_13: J10.13 R16.1 | length 63.5
  Top Layer w0.254: R16.1 32.292,22.725 v1(32.36,22.657)
  Bottom Layer w0.254: J10.13 12.497,44.763 12.497,34.874 10.307,32.684 10.307,30.511 10.871,29.947 13.487,29.947 18.11,34.569 22.428,34.569 26.416,30.582 30.734,30.582 32.36,28.956 v1(32.36,22.657)
NetJ11_6: J11.6 R19.1 R20.1 | length 56.7
  Top Layer w0.254: R19.1 10.008,54.432 10.008,53.365 11.532,51.841 v1(11.532,48.057) ; R20.1 19.634,58.488 20.498,59.351 v1(20.498,64.567)
  Bottom Layer w0.254: v1(11.532,48.057) 16.084,48.057 ; v1(20.498,64.567) 13.868,57.937 13.868,50.273 16.084,48.057 ; J11.6 17.883,48.057 16.084,48.057
NetJ11_8: J11.8 R27.1 R28.1 | length 33.8
  Top Layer w0.254: R27.1 22.606,59.03 24.155,57.48 v1(24.155,55.524) ; J11.8 30.429,42.02 30.522,42.113 R28.1
  Bottom Layer w0.254: v1(24.155,55.524) 21.209,55.524 16.764,51.079 16.764,50.165 24.909,42.02 J11.8
NetJ11_9: J11.9 R29.1 SW4.B2 | length 60.2
  Top Layer w0.254: J11.9 30.505,44.56 30.522,44.577 R29.1 ; SW4.B2 51.816,26.941 52.095,27.22 52.095,40.259 51.308,41.046 v1(50.698,41.046)
  Bottom Layer w0.254: J11.9 27.351,46.209 27.351,54.885 28.346,55.88 35.865,55.88 v1(50.698,41.046)
NetJ11_10: J11.10 R25.1 SW3.B2 | length 34.5
  Top Layer w0.254: v1(47.371,37.871) 47.371,39.992 R25.1 48.844,39.992 49.396,39.441 SW3.B2
  Bottom Layer w0.254: J11.10 27.859,48.241 27.859,50.44 28.219,50.8 33.96,50.8 46.888,37.871 v1(47.371,37.871)
NetJ11_11: J11.11 R22.1 R23.1 | length 36.4
  Top Layer w0.254: R22.1 14.366,53.594 14.671,53.289 ; R23.1 17.56,58.488 17.882,58.166 17.882,53.848 17.323,53.289 14.671,53.289 ; v1(18.339,50.521) 17.439,50.521 14.671,53.289
  Bottom Layer w0.254: v1(18.339,50.521) 25.578,43.282 29.464,43.282 30.15,43.967 30.15,48.49 J11.11
NetJ11_12: J11.12 R24.1 SW2.B2 | length 22.1
  Top Layer w0.254: J11.12 38.024,52.18 38.46,51.744 R24.1 48.717,51.744 49.384,52.411 SW2.B2
NetQ1_1: Q1.1 Q2.3 R14.2 | length 10.9
  Top Layer w0.254: Q1.1 40.208,34 41.285,35.077 Q2.3 41.621,33.757 42.748,32.63 42.748,28.618 42.04,27.91 41.553,27.91 R14.2
NetQ1_2: Q1.2 R15.1 | length 7.1
  Top Layer w0.254: Q1.2 39.37,35.9 39.09,35.62 39.09,33.219 40.762,31.547 41.901,31.547 R15.1
NetQ2_1: Q2.1 R16.2 | length 34.9
  Top Layer w0.254: v1(30.429,33.02) 30.429,22.708 31.496,21.641 33.61,21.641 33.843,21.874 R16.2 ; v1(41.453,38.176) 42.469,37.16 42.469,34.544 42.885,34.127 Q2.1
  Bottom Layer w0.254: v1(30.429,33.02) 35.585,38.176 v1(41.453,38.176)
NetQ3_1: Q3.1 R19.2 | length 4
  Top Layer w0.254: Q3.1 10.601,56.887 11.125,56.363 R19.2
NetQ3_3: Q3.3 R18.2 | length 9.6
  Top Layer w0.254: Q3.3 8.601,57.048 8.103,56.55 8.103,52.629 8.815,51.917 R18.2
NetQ4_1: Q4.1 R22.2 | length 8
  Top Layer w0.254: Q4.1 13.208,60.411 13.64,59.98 13.64,57.506 16.317,54.828 R22.2
NetQ4_3: Q4.3 R21.2 | length 12.8
  Top Layer w0.254: Q4.3 14.487,58.969 v1(16.332,57.125) ; v1(21.615,57.252) 22.86,56.007 22.86,53.95 R21.2
  Bottom Layer w0.254: v1(16.332,57.125) 16.459,57.252 v1(21.615,57.252)
NetQ5_1: Q5.1 R27.2 | length 13.1
  Top Layer w0.254: Q5.1 22.896,66.915 24.558,65.253 R27.2
NetQ5_3: Q5.3 R26.2 | length 16.8
  Top Layer w0.254: R26.2 20.662,56.244 20.599,56.307 20.599,58.276 21.539,59.216 21.539,64.872 21.946,65.278 Q5.3
NetR2_2: R2.2 R5.1 U1.10 | length 4.5
  Top Layer w0.254: U1.10 19.363,38.385 19.979,37.77 R2.2 21.158,37.758 R5.1
NetR3_1: R3.1 U1.1 U1.2 | length 3.7
  Top Layer w0.254: R3.1 11.359,43.465 U1.1 U1.2
NetR6_2: R6.2 R7.1 U1.12 | length 4.5
  Top Layer w0.254: U1.12 19.363,40.925 19.814,41.377 R6.2 21.184,43.485 R7.1
NetR8_1: R8.1 U2.1 U2.2 | length 3.4
  Top Layer w0.254: R8.1 10.663,24.588 U2.1 U2.2
NetR10_1: R10.1 U2.8 U2.9 | length 3.5
  Top Layer w0.254: U2.9 U2.8 18.347,16.968 18.581,16.733 R10.1
NetU1_8: U1.8 U1.9 | length 1.3
  Top Layer w0.254: U1.8 U1.9
NetU1_13: U1.13 U1.14 | length 1.3
  Top Layer w0.254: U1.13 U1.14
pads on no net: J4. J10.1 J10.4 J10.5 J10.7 J10.8 J10.9 J10.10 J10.11 J10.12 J10.14 J10.15 J10.16 J10.17 J10.18 J10.19 J10.20 J11.1 J11.2 J11.3 J11.4 J11.5 J11.7 J11.17 J11.18 J11.19 J11.20 SW2.A2 SW2.B1 SW3.A2 SW3.B1 SW4.A2 SW4.B1 U3.4

## Polygon pours and split planes (outlines as drawn)
no net on Top Layer "NONET_L01_P000" (solid, pour order 0): 0.483,74.574 0.787,74.27 0.787,1.143

## Dimensions
2.5,67.46 to 0,75 on Top Layer